# Altium PCB 505147_1_1.PcbDoc
Units mil, origin at the board's own origin, x right, y up, seen from the top; angles counter-clockwise.
Board outline 3550 x 2525 mil, 2 copper layers (Top Layer, Bottom Layer); 5 components, 5 nets, 19 pads, 4 vias.
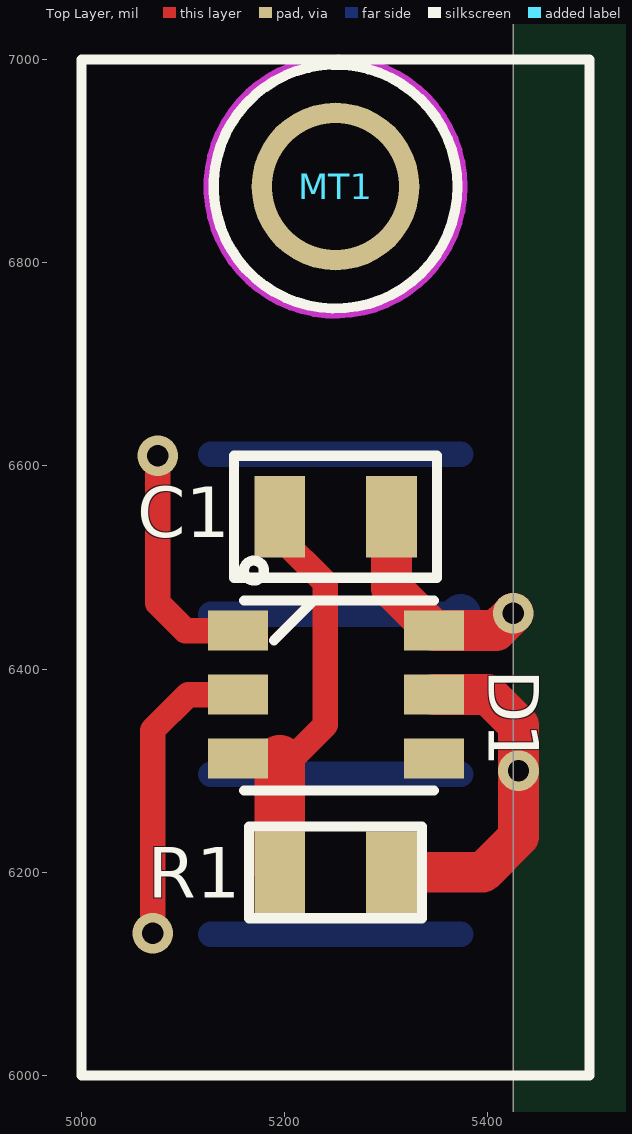
[diagram p0: Top Layer view]
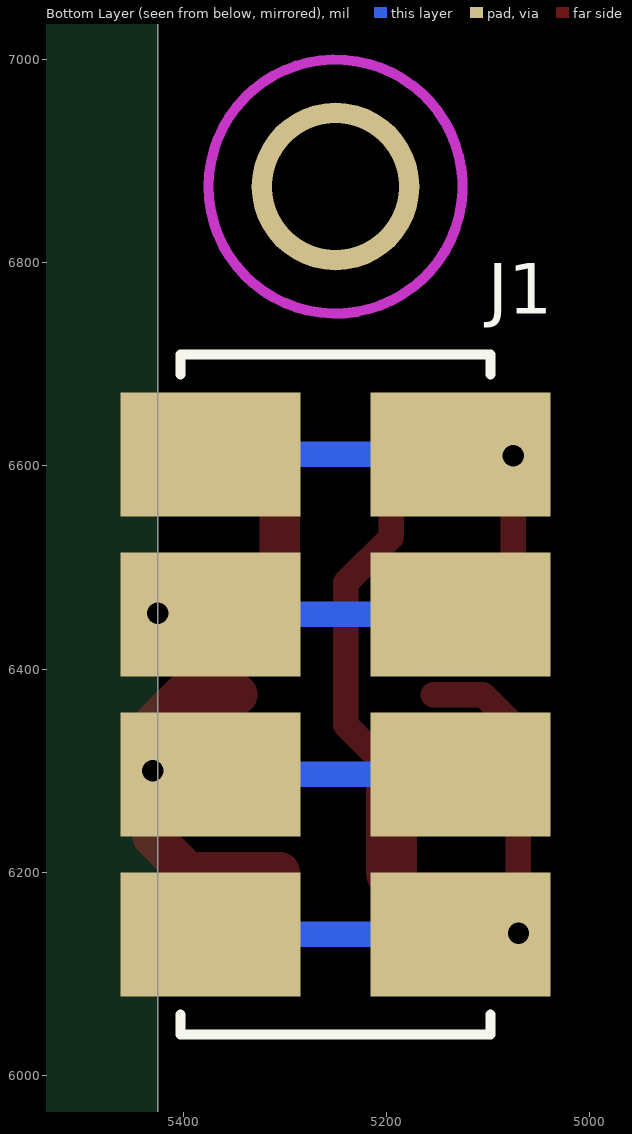
[diagram p1: Bottom Layer view, seen from below]

## Layer stack, top to bottom
Top Layer: signal copper 1.4
Dielectric: core 12.6, FR-4, Dk 4.8
Bottom Layer: signal copper 1.4

## Board outline
5425,4625 8975,4625 8975,7150 5425,7150

## Design rules (kind name [scope] priority, off if disabled: settings)
Clearance LED [(HasFootprint('LED T-1'))] p1: gap=0
Clearance POLYGON [(InPolygon)] p2: gap=35
Clearance JUMPER [(HasFootprint('JUMPER_SMT'))] p3: gap=0
Clearance [All] p4: gap=15
ComponentClearance [All] p1: gap=5 collisioncheckmode=0 verticalgap=10
HoleSize [All] p1: absolutevalues=TRUE maxlimit=126 minlimit=1 maxpercent=80.000 minpercent=20.000
PasteMaskExpansion [All] p1: expansion=-5
PlaneClearance [All] p1: clearance=35
PlaneConnect [All] p1: planeconnectstyle=Relief reliefexpansion=25 reliefentries=4 reliefconductorwidth=25 reliefairgap=25
PolygonConnect [All] p1: connectstyle=Direct reliefconductorwidth=25 reliefentries=4 polygonreliefangle="90 Angle"
RoomDefinition 505147_1_1 [InComponentClass('505147_1_1')] p1: confinementstyle=ConfineIn formatcopy=TRUE lockcomponents=FALSE outline 4230,5015 6290,5015 6290,7640 4230,7640
RoutingVias [All] p1: holewidth=20 width=41 viastyle="Through Hole" minholewidth=20 minwidth=41 maxholewidth=35 maxwidth=65
SMDNeckDown [All] p1 off: percent=75.000
SolderMaskExpansion [All] p1: expansion=4
TestPointUsage [All] p1: valid=0 allowmultiple=FALSE
Testpoint [All] p1: side=15 testpointundercomponent=TRUE minsize=40 maxsize=100 preferedsize=60 minholesize=0 maxholesize=40 preferedholesize=32 testpointgrid=1 style=1023 order=0-112345678
Width [All] p1: maxlimit=250 minlimit=5 preferedwidth=25 bottomlayer_prefwidth=50 minimp=50.000000 maximp=50.000000 favimp=50.000000
Width DC [(InNet('DC*'))] p2: maxlimit=100 minlimit=15 preferedwidth=50
Width AC [(InNet('AC1') or InNet('AC2'))] p3: maxlimit=100 minlimit=15 preferedwidth=50
14 further rules are at their usual default settings.

## Components (designator, comment, footprint, x,y, rotation, side; value= is the part's Value field where it differs from the comment)
C1 "CAP_1206" SMT_1206 5250,6550 r270 top
D1 "LED_NEOPIXEL" NEOPIXEL 5346.8,6437.98 r180 top
J1 "IDC CONN, 4-pin" IDC_CONN_SMT 5127,6139 r90 bottom
MT1 "MOUNTING HOLE" "MOUNTING HOLE" 5250,6875 r0 top
R1 "RES_1206" SMT_1206_MOD 5250,6200 r270 top

## Footprints (in the part's own frame and the unit in brackets; to place one, negate y for a bottom-side part, rotate by r counter-clockwise, add the part's x,y. Pads: shape width x height; smd on the part's side, far side on the other; paste and mask are expansions set on the pad)
IDC_CONN_SMT [mm] "FOR NEOPIXEL BOARDS"
  rect 3.1x4.5 smd: 1(0,6.25) 1(0,0) 2(4,0) 2(4,6.25) 3(8,0) 3(8,6.25) 4(12,0) 4(12,6.25)
  silkscreen extent -2.5,-0.75 14.5,7
"MOUNTING HOLE" [mil] "Mounting Hole"
  round 165 hole 125: 1(0,0)
  Keep-Out Layer circle w10: c0,0 r125
  silkscreen extent -120,-120 120,120
NEOPIXEL [mm] "Adafruit Neopixel"
  rect 1.5x1 smd: 1(4.897,0) 2(4.897,1.6) 3(4.897,3.2) 4(0,3.2) 5(0,1.6) 6(0,0)
  silkscreen extent 0,-1.75 4.75,4
SMT_1206 [mil]
  rect 80x50 smd: 1(0,55) 2(0,-55)
  silkscreen extent -60,-100 60,100
SMT_1206_MOD [mil]
  rect 80x50 smd: 1(0,55) 2(0,-55)
  silkscreen extent -45,-85 45,85

## Part data
C1: "CAP"
D1: "RGB NEOPIXEL"
J1: "ICD Connector, 4-Pin"
R1: "RES"

## Via types
v1: diameter 40, hole 21, Top Layer to Bottom Layer, 4 vias

## Nets (pads, with @x,y where several pads share a name; then routed paths per layer and width w, separated by ;. In a path a pad name is that pad's centre, name@x,y a point inside that pad or via, vN(x,y) a via of type N, cw(c..) or ccw(c..) an arc to the next point about the centre after c; other vN are vias at no path point)
DI: D1.2 J1.1 | length 544.6
  Top Layer w25: v1(5070,6140) 5070,6340 5104.99,6374.99 D1.2
  Bottom Layer w25: J1.1@5127,6139 J1.1@5373.06,6139
DO: D1.1 J1.4 | length 481.3
  Top Layer w25: v1(5075,6610) 5075,6465 5102.02,6437.98 D1.1
  Bottom Layer w25: J1.4@5127,6611.44 J1.4@5373.06,6611.44
GND: C1.1 D1.6 J1.3 | length 460.6
  Top Layer w40: C1.1 5305,6479.78 D1.6 5407.98,6437.98 v1(5425,6455)
  Bottom Layer w25: J1.3@5127,6453.96 J1.3@5373.06,6453.96
NetC1_2: C1.2 D1.3 R1.2 | length 446.3
  Top Layer w25: D1.3@5156,6310 5205,6310 ; 5195,6300 5240,6345 5240,6485 5195,6530 C1.2
  Top Layer w50: R1.2 5195,6310
VDD: D1.5 J1.2 R1.1 | length 591.2
  Top Layer w40: R1.1 5395,6200 5430,6235 5430,6345 5400.01,6374.99 D1.5
  Bottom Layer w25: J1.2@5127,6296.48 J1.2@5373.06,6296.48
  other v1: 5430,6300
pads on no net: D1.4 MT1.1

## Silkscreen, mask and mechanical layers (free items; w line width, h text height)
Top Overlay:
  lines w10: 5000,6000 5000,7000 5500,7000 5500,6000 5000,6000
Mechanical 4:
  text ".Pcb_File_Name" at 1200,3525 h100
  text ".Print_Date" at 1200,3275 h100
Mechanical 5:
  lines w1: 5000,6000 5500,6000 5500,7000 5000,7000 5000,6000
Mechanical 9:
  text "-SB" at 2000,8775 h150
  text "3. All marking on PCB must be white silk screen." at 1200,1775 h100
  text "BOTTOM SILKSCREEN" at 9550,1350 h80
  text "-SB" at 11200,1050 h100
Mechanical 10:
  text "-T" at 2000,8775 h150
  text "3. PCB is double sided." at 1200,1775 h100
  text "4. Holes are plated through." at 1200,1625 h100
  text "5. All bare copper on PCB must be tin plated." at 1210,1475 h100
  text "TOP COPPER" at 9575,1350 h80
  text "-T" at 11200,1050 h100
Mechanical 11:
  text "-B" at 2000,8775 h150
  text "3. PCB is double sided." at 1200,1775 h100
  text "4. Holes are plated through." at 1200,1625 h100
  text "5. All bare copper on PCB must be tin plated." at 1210,1475 h100
  text "BOTTOM COPPER" at 9600,1350 h80
  text "-B" at 11200,1050 h100
Mechanical 12:
  text "-MT" at 2000,8775 h150
  text "3. Top side of PCB must be covered with green solder mask." at 1200,1775 h100
  text "TOP SOLDERMASK" at 9550,1350 h80
  text "-MT" at 11200,1050 h100
Mechanical 13:
  text "-MB" at 2000,8775 h150
  text "3. Bottom side of PCB must be covered with green solder mask." at 1200,1775 h100
  text "BOTTOM SOLDERMASK" at 9550,1350 h80
  text "-MB" at 11200,1050 h100
Mechanical 14:
  text "-ST" at 2000,8775 h150
  text "3. All marking on PCB must be white silk screen." at 1200,1775 h100
  text "TOP SILKSCREEN" at 9550,1350 h80
  text "-ST" at 11200,1050 h100
Mechanical 15:
  text "-D" at 2000,8775 h150
  text "MECHANICAL" at 9550,1350 h80
  text "-D" at 11200,1050 h100
Mechanical 16:
  lines w5: 2500,8700 2500,9000
  lines w10: 1000,1000 11500,1000 11500,9000 1000,9000 1000,1025 ; 7887.71,1275 11500,1275 ; 7887.71,1550 11500,1550 ; 7887.71,1825 11500,1825 ; 7887.71,2100 11487.71,2100 ; 7887.71,8250 11500,8250 ; 7887.71,8400 11500,8400 ; 7887.71,8550 11500,8550 ; 7887.71,8700 11500,8700 ; 7887.71,8850 11500,8850 ; 8137.71,8250 8137.71,9000 ; 8512.71,8250 8512.71,9000 ; 8762.71,8250 8762.71,9000 ; 8787.71,1000 8787.71,1275 ; 8787.71,1550 8787.71,2100 ; 9687.71,1550 9687.71,2100 ; 10587.71,1000 10587.71,1275 ; 10587.71,1825 10587.71,2100
  lines w16: 1000,8700 6292.09,8700 6292.09,9000 ; 2500,8700 2500,9000 ; 7887.71,1000 7887.71,2525 11487.71,2525 ; 7887.71,2100 11500,2100 ; 7887.71,8250 7887.71,9000
  text "REV." at 7925,8900 h50
  text "DATE" at 8233.55,8900 h50
  text "BY" at 8596.05,8900 h50
  text "DESCRIPTION" at 9818.86,8900 h50
  text "PROPRIETARY INFORMATION. DO NOT REPRODUCE, COPY," at 2575,8890 h50
  text "505XXX" at 1125,8775 h150
  text "OR USE WITHOUT EXPRESS WRITTEN PERMISSION." at 2575,8775 h50
  text "PRELIMINARY" at 9750,8750 h60
  text "1" at 7992.71,8745 h60
  text "XXXXXX" at 8155,8745 h60
  text "BC" at 8577.71,8745 h60
  text "-" at 8300,8600 h60
  text "-" at 7992.71,8595 h60
  text "-" at 8617.71,8595 h60
  text "-" at 10111.36,8595 h60
  text "-" at 7992.71,8445 h60
  text "-" at 8300,8445 h60
  text "-" at 8617.71,8445 h60
  text "-" at 10111.36,8445 h60
  text "-" at 7992.71,8295 h60
  text "-" at 8300,8295 h60
  text "-" at 8617.71,8295 h60
  text "-" at 10111.36,8295 h60
  text "space-eight.com" at 8900,2325 h100
  text "REMARKS:" at 1200,2225 h100
  text "343 NW 84TH ST, SEATTLE, WA 98117, PH: 323 791-6991" at 8375,2175 h50
  text "1. Dimensions are in inches." at 1200,2075 h100
  text "DATE:" at 7912.71,2025 h50
  text "DRAWN BY:" at 8812.71,2025 h50
  text "CHECKED BY:" at 9712.71,2025 h50
  text "APPROVED BY:" at 10612.71,2025 h50
  text "2. Board size is X in x X in." at 1200,1925 h100
  text "XXXXXX" at 8100,1885 h80
  text "BC" at 9200,1885 h80
  text "BC" at 10100,1885 h80
  text "LAST REV. DATE:" at 7912.71,1750 h50
  text "REV. LEVEL:" at 8812.71,1750 h50
  text "MATERIAL:" at 9712.71,1750 h50
  text "FR4, NATURAL" at 10200,1725 h50
  text "-" at 8200,1600 h80
  text "1" at 9200,1600 h80
  text "THICKNESS:" at 9712.71,1600 h50
  text ".062in, 1oz. Cu" at 10200,1600 h50
  text "TITLE:" at 7912.71,1475 h50
  text "PCB FOR SP11XXXX" at 8200,1350 h80
  text "SCALE:" at 7912.71,1200 h50
  text "TOL:" at 8812.71,1200 h50
  text ".XX(.X)" at 9200.21,1200 h50
  text ".XXX(.XX)" at 9775.21,1200 h50
  text "ANGLE:" at 10275,1200 h50
  text "DRAWING NUMBER:" at 10625,1200 h50
  text "1:1" at 8311.05,1060 h80
  text ".010(.25)" at 9000,1060 h80
  text ".005(.13)" at 9700,1060 h80
  text "-" at 10423.55,1060 h80
  text "505XXX" at 10625,1050 h100
Drill Drawing:
  text ".Legend" at 1250,2925 h100
  text "Drill Legend" at 1225,2600 h100